# EAGLE board RC_Engine_Sound_ESP32 (EAGLE 9.6.1)
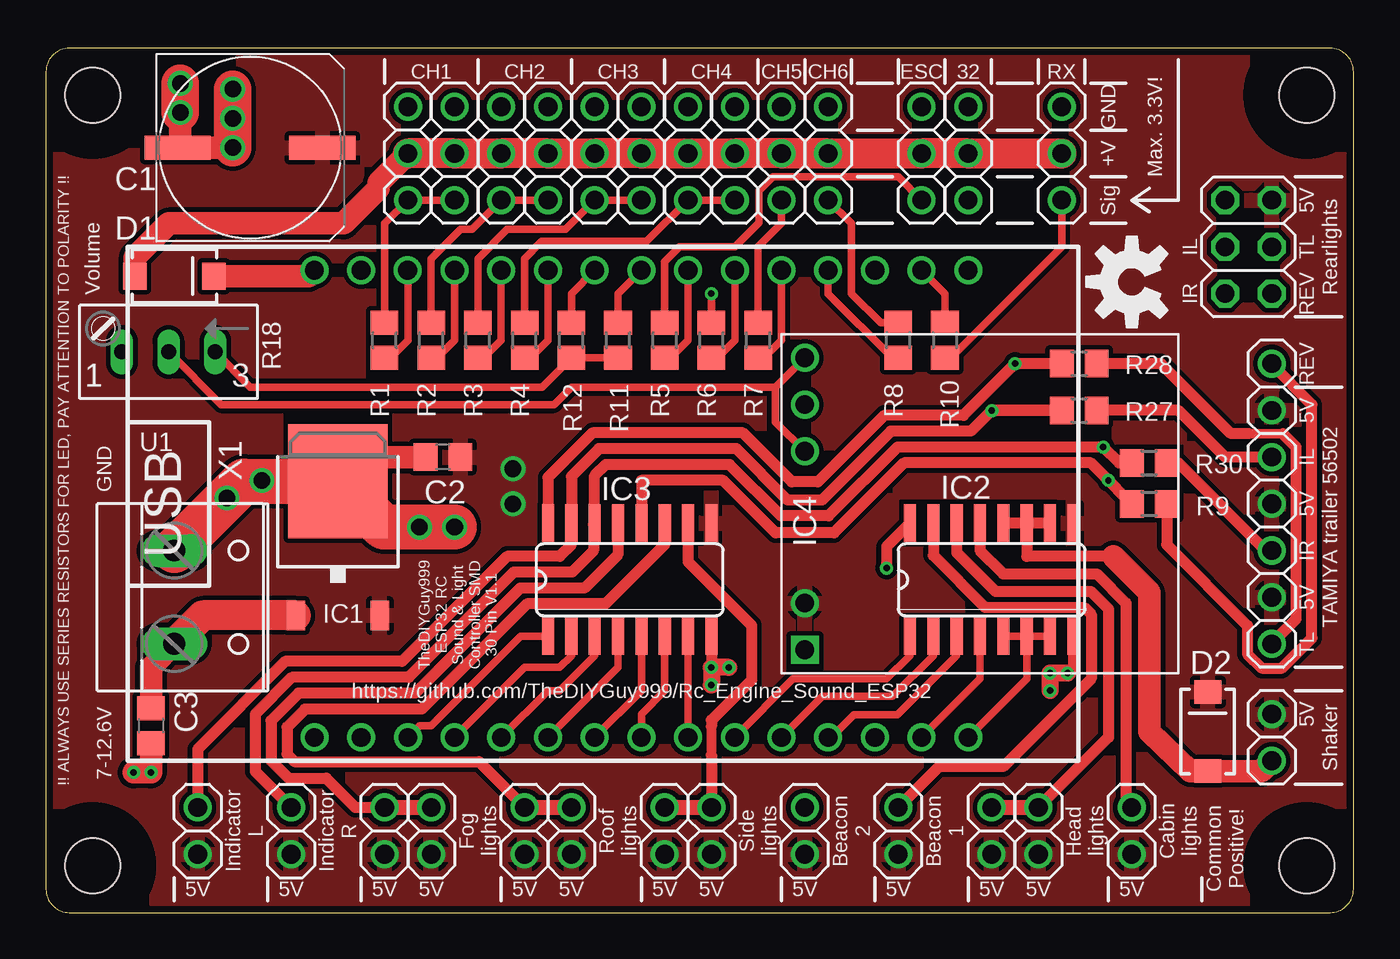
[diagram p0: board, top side]
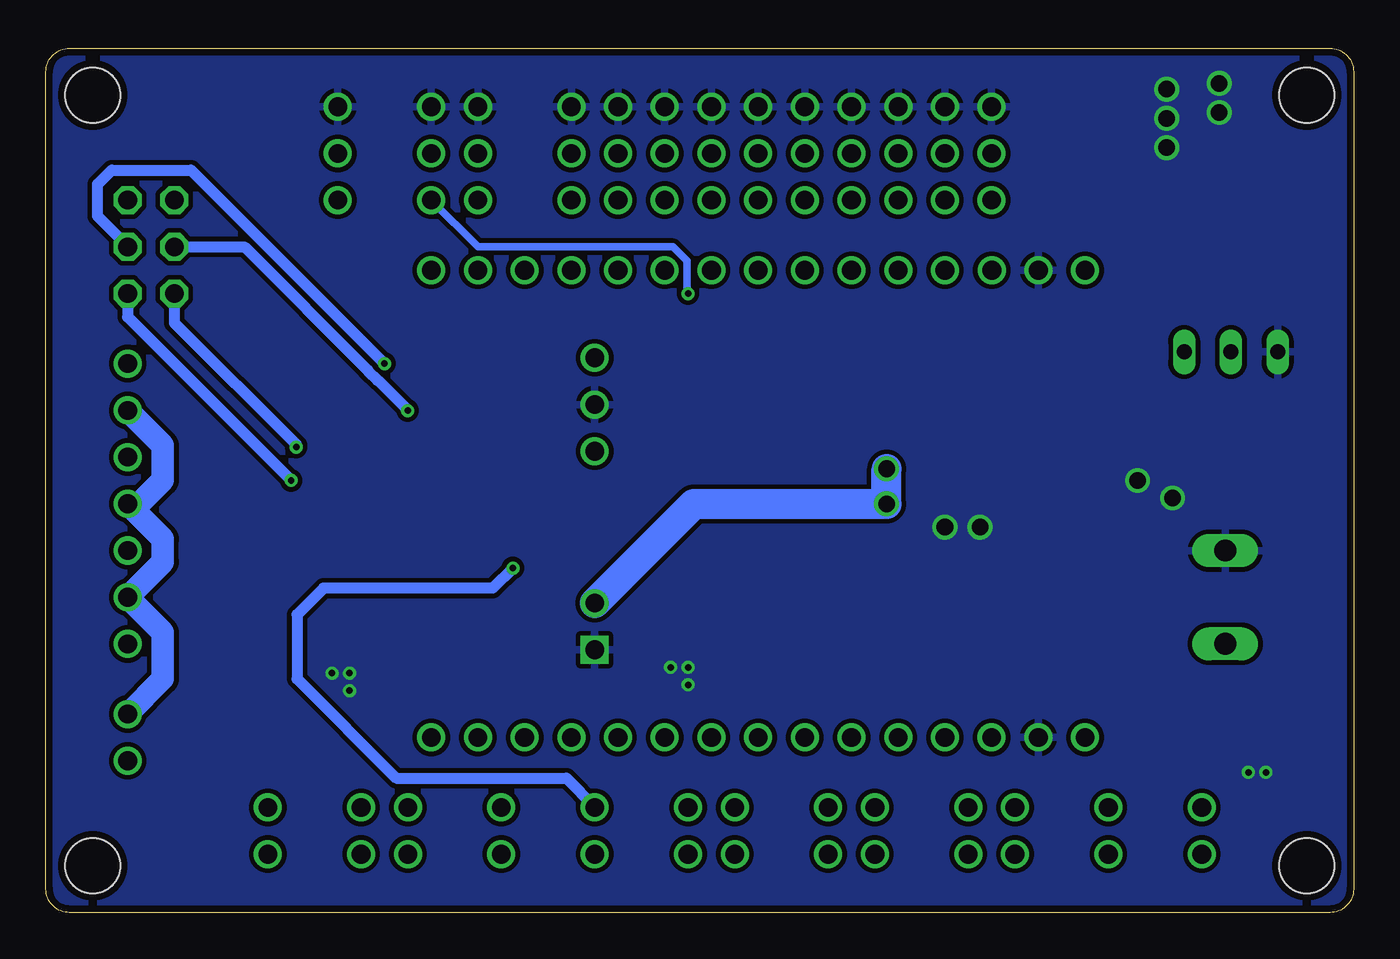
[diagram p1: board, bottom side, seen from below]

Size 71.12 x 46.99 mm. Coordinates in mm from the lower left corner, seen from the top.
Outline: 0,45.72 0,1.27 arc90 1.27,0 69.85,0 arc90 71.12,1.27 71.12,45.72 arc90 69.85,46.99 1.27,46.99 arc90 0,45.72
Copper layers (1*16): Top 0.0356mm / dielectric 1.5011mm / Bottom 0.0356mm
Design rules "OSHPark_LaenPCBOrder": minimum track width 6mil, minimum drill 13mil, track to track 6mil, track to pad 6mil, pad to pad 6mil, via to via 6mil, smd to smd 6mil, copper to edge 15mil, drill to drill 6mil, minimum pad ring 7mil, minimum via ring 7mil, stop-mask expansion 3mil, vias tented up to drill 0mil, thermal gap 10mil
Net classes: 0 5V: clearance 0.254 mm
Holes 3 mm at 2.54,44.45 2.54,2.54 68.58,2.54 68.58,44.45
tRestrict: area -0.7,41.2 to 5.8,47.7; area 65.3,41.2 to 71.8,47.7; area 65.3,-0.7 to 71.8,5.8; area -0.7,-0.7 to 5.8,5.8

## Footprints (pad centres in the part's own frame; a part is rotated, then mirrored left to right if it is on the bottom)
UD-10X10_NICHICON = smd 3.6 x 1.3: + 3.925,0; - -3.95,0
C0805 = smd 1.3 x 1.5: 1 -0.95,0; 2 0.95,0
SMA-DIODE = smd 1.27 x 1.47: A -2.15,0; C 2.15,0
TO252 = smd 1 x 1.6: 1 -2.28,-4.8; 2 2.28,-4.8 | smd 5.4 x 6.2: 3 0,2.5
SO16 = smd 0.66 x 2.032: 1 -4.445,-3.073; 2 -3.175,-3.073; 3 -1.905,-3.073; 4 -0.635,-3.073; 5 0.635,-3.073; 6 1.905,-3.073; 7 3.175,-3.073; 8 4.445,-3.073; 9 4.445,3.073; 10 3.175,3.073; 11 1.905,3.073; 12 0.635,3.073; 13 -0.635,3.073; 14 -1.905,3.073; 15 -3.175,3.073; 16 -4.445,3.073
PAM8403_NO_SPEAKERS = drill 1.016 square: 1 -7.62,8.89 | drill 1.016: 2 -5.08,8.89; 3 3.175,8.89; 4 5.715,8.89; 5 8.255,8.89
1X03 = drill 1.016 pad 1.524: 1 -2.54,0; 2 0,0; 3 2.54,0
1X02 = drill 1.016 pad 1.524: 1 -1.27,0; 2 1.27,0
2X03 = drill 1.016 octagon: 1 -2.54,-1.27; 2 -2.54,1.27; 3 0,-1.27; 4 0,1.27; 5 2.54,-1.27; 6 2.54,1.27
1X07 = drill 1.016: 1 -7.62,0; 2 -5.08,0; 3 -2.54,0; 4 0,0; 5 2.54,0; 6 5.08,0; 7 7.62,0
R0805 = smd 1.3 x 1.5: 1 -0.95,0; 2 0.95,0
S64W = drill 0.813 long: A 2.54,1.27; E -2.54,1.27; S 0,1.27
ESP32-DEVKITV1 = drill 1.016: 3V3 -16.51,-12.7; D1 13.97,-12.7; D2 -8.89,-12.7; D3 11.43,-12.7; D4 -6.35,-12.7; D5 1.27,-12.7; D12 -8.89,12.7; D13 -11.44,12.7; D14 -6.35,12.7; D15 -11.43,-12.7; D16 -3.81,-12.7; D17 -1.27,-12.7; D18 3.81,-12.7; D19 6.35,-12.7; D21 8.89,-12.7; D22 16.51,-12.7; D23 19.05,-12.7; D25 1.27,12.7; D26 -1.27,12.7; D27 -3.81,12.7; D32 6.35,12.7; D33 3.81,12.7; D34 11.43,12.7; D35 8.89,12.7; D36 16.51,12.7; D39 13.97,12.7; EN 19.05,12.7; GND@1 -13.97,12.7; GND@2 -13.97,-12.7; VIN -16.51,12.7
W237-132 = drill 1.194 long: 1 -2.54,-0.635; 2 2.54,-0.635

## Placement (x,y rotation side)
C1  1000uF 10V  [UD-10X10_NICHICON]  11.11,41.59 0 top
C2  100nF  [C0805]  21.59,24.77 180 top
C3  100nF  [C0805]  5.71,10.16 270 top
D1  SS14F  [SMA-DIODE]  6.99,34.61 0 top
D2  SS14F  [SMA-DIODE]  63.18,9.84 90 top
IC1  7805DT  [TO252]  15.88,20.96 0 top
IC2  ULN2003AD  [SO16]  51.44,18.1 0 top
IC3  ULN2003AD  [SO16]  31.75,18.1 0 top
IC4  PAM8403_NO_SPEAKERS  [PAM8403_NO_SPEAKERS]  50.16,21.91 90 top
JP1  [1X03]  19.68,41.27 270 top
JP2  [1X03]  22.22,41.27 270 top
JP3  [1X03]  24.76,41.27 270 top
JP4  [1X03]  27.3,41.27 270 top
JP5  [1X03]  29.84,41.27 270 top
JP6  [1X03]  32.39,41.27 270 top
JP7  [1X03]  34.93,41.27 270 top
JP8  [1X03]  37.47,41.27 270 top
JP9  [1X03]  47.62,41.27 270 top
JP10  [1X03]  50.16,41.27 270 top
JP11  [1X03]  40.01,41.27 270 top
JP12  [1X03]  42.55,41.27 270 top
JP14  [1X03]  55.25,41.27 270 top
JP16  [1X02]  8.26,4.45 90 top
JP17  [1X02]  13.34,4.45 90 top
JP18  [1X02]  18.41,4.45 90 top
JP19  [1X02]  20.95,4.45 90 top
JP20  [2X03]  65.41,36.2 90 top
JP21  [1X02]  26.04,4.45 90 top
JP22  [1X02]  28.57,4.45 90 top
JP23  [1X02]  33.66,4.45 90 top
JP24  [1X02]  36.2,4.45 90 top
JP25  [1X02]  41.27,4.45 90 top
JP26  [1X02]  46.36,4.45 90 top
JP27  [1X02]  51.44,4.45 90 top
JP28  [1X02]  53.98,4.45 90 top
JP29  [1X02]  66.67,9.53 270 top
JP30  [1X07]  66.67,22.23 270 top
JP31  [1X02]  59.05,4.45 90 top
LOGO1  OSHW-LOGOM  [OSHW-LOGO-M]  59.05,34.29 90 top
R1  330R  [R0805]  18.41,31.12 90 top
R2  330R  [R0805]  20.95,31.12 90 top
R3  330R  [R0805]  23.49,31.12 90 top
R4  330R  [R0805]  26.04,31.12 90 top
R5  330R  [R0805]  33.66,31.12 90 top
R6  330R  [R0805]  36.2,31.12 90 top
R7  330R  [R0805]  38.73,31.12 90 top
R8  330R  [R0805]  46.36,31.12 90 top
R9  200R  [R0805]  60.01,22.23 0 top
R10  330R  [R0805]  48.9,31.12 270 top
R11  10k  [R0805]  31.11,31.12 90 top
R12  10k  [R0805]  28.57,31.12 90 top
R18  20k  [S64W]  6.67,31.75 180 top
R27  200R  [R0805]  56.2,27.31 0 top
R28  47R  [R0805]  56.2,29.85 0 top
R30  200R  [R0805]  60.01,24.45 0 top
U1  ESP32DEVKITV1  [ESP32-DEVKITV1]  31.11,22.23 0 top
X1  [W237-132]  7.62,17.15 270 top

## Library data of the parts
C1 = rcl; SPICEPREFIX: C
C2 C3 = rcl
D1 D2 = SparkFun-DiscreteSemi; PROD_ID: DIO-08053
IC1 = linear
IC2 IC3 = uln-udn
IC4 = 00_custom
JP1-JP12 JP14 JP16-JP31 = 00_custom_pinhead
LOGO1 = SparkFun-Aesthetics
R1-R12 R27 R28 R30 = rcl; SPICEPREFIX: R
R18 = pot
U1 = ESP32-DEVKITV1_30pin
X1 = con-wago-508; OC_FARNELL: unknown; OC_NEWARK: unknown

## Nets
3V3: U1.3V3
5V: C1.+ C2.1 D2.C IC1.2 IC2.9 IC3.9 IC4.2 JP16.1 JP17.1 JP18.1 JP19.1 JP20.5 JP21.1 JP22.1 JP23.1 JP24.1 JP25.1 JP26.1 JP27.1 JP28.1 JP29.1 JP30.2 JP30.4 JP30.6 JP31.1
5V_ESC: D1.A JP1.2 JP2.2 JP3.2 JP4.2 JP5.2 JP6.2 JP7.2 JP8.2 JP9.2 JP10.2 JP11.2 JP12.2 JP14.2
BAT+: C3.1 IC1.1 X1.2
BEACONLIGHT1: IC2.15 JP26.2
BEACONLIGHT2: IC2.16 JP25.2
CABINLIGHTS: IC2.13 JP31.2
D1: U1.D1
D2: IC3.2 U1.D2
D3: IC2.3 U1.D3
D4: IC3.3 U1.D4
D5: IC3.6 U1.D5
D12: R2.1 U1.D12
D13: R1.1 U1.D13
D14: R3.1 U1.D14
D15: IC3.1 U1.D15
D16: IC3.4 U1.D16
D17: IC3.5 U1.D17
D18: IC3.7 U1.D18
D19: IC2.1 U1.D19
D21: IC2.2 U1.D21
D22: IC2.4 U1.D22
D23: IC2.5 IC2.6 IC2.7 U1.D23
D25: R11.2 U1.D25
D26: R12.2 U1.D26
D27: R4.1 U1.D27
D32: R6.1 U1.D32
D33: R5.1 U1.D33
D34: R8.1 U1.D34
D35: R7.1 U1.D35
D36: R10.1 U1.D36
D39: U1.D39
FOGLIGHTS: IC3.13 JP18.2 JP19.2
GND: C1.- C2.2 C3.2 IC1.3 IC2.8 IC3.8 IC4.1 IC4.4 JP1.1 JP2.1 JP3.1 JP4.1 JP5.1 JP6.1 JP7.1 JP8.1 JP9.1 JP10.1 JP11.1 JP12.1 JP14.1 R18.A U1.GND@1 U1.GND@2 X1.1
HEADLIGHTS: IC2.14 JP27.2 JP28.2
INDICATOR_L: IC3.15 JP16.2 JP20.4 R27.1
INDICATOR_R: IC3.14 JP17.2 JP20.2 R30.1
N$1: IC4.3 IC4.5 R18.S
N$2: R11.1 R12.1 R18.E
N$3: JP1.3 JP2.3 R1.2
N$4: JP30.7 R28.2
N$5: JP3.3 JP4.3 R2.2
N$6: JP5.3 JP6.3 R3.2
N$7: JP7.3 JP8.3 R4.2
N$8: JP9.3 R5.2
N$9: D1.C U1.VIN
N$10: JP10.3 R6.2
N$11: JP11.3 R7.2
N$12: JP12.3 R8.2
N$13: JP30.5 R30.2
N$14: JP14.3 R10.2
N$15: JP30.3 R27.2
N$16: JP30.1 R9.2
REVERSING: IC3.12 JP20.1 R9.1
ROOFLIGHTS: IC3.11 JP21.2 JP22.2
SHAKER: D2.A IC2.10 IC2.11 IC2.12 JP29.2
SIDELIGHTS: IC3.10 JP23.2 JP24.2
TAILLIGHTS: IC3.16 JP20.3 R28.1

## Tracks (layer width: path | path; a pad name or v marks a point on that pad's centre or on a via)
5V  (via drill 0.9)
  Bottom 1.219: JP30.2 64.77,25.4 64.77,23.5 66.04,22.23 JP30.4 64.77,20.32 64.77,19.05 JP30.6 64.77,15.24 64.77,12.7 JP29.1
  Bottom 1.626: IC4.2 35.88,22.23 v25.4,22.23 v25.4,24.13
  pour Top: -3.13,-1.91 -3.13,19.52 -2.8,48.89 73.02,48.89 73.02,-1.91
5V_ESC
  Top 1.219: JP1.2 18.1,39.69 18.1,39.37 16.19,37.46 6.67,37.46 4.83,35.63 D1.A
  Top 1.626: JP12.2 JP11.2 | JP11.2 JP9.2 JP10.2 JP14.2 | JP11.2 JP8.2 JP7.2 JP6.2 JP5.2 JP4.2 JP3.2 JP2.2 JP1.2
BAT+
  Top 1.219: C3.1 5.71,13.33 X1.2
  Top 1.626: X1.2 6.99,14.62 8.52,16.16 IC1.1
BEACONLIGHT1
  Top 0.61: IC2.15 48.26,19.42 51.08,16.6 56.48,16.6 56.86,16.22 56.86,12.72 52.07,7.94 48.58,7.94 JP26.2
BEACONLIGHT2  (via drill 0.35)
  Top 0.61: IC2.16 45.72,19.9 v45.72,18.73
  Bottom 0.61: v45.72,18.73 46.82,17.64 56.02,17.64 57.47,16.19 57.47,12.7 52.07,7.3 42.81,7.3 41.27,5.77 JP25.2
CABINLIGHTS
  Top 0.61: IC2.13 50.8,19.69 52.07,18.42 57.15,18.42 58.74,16.83 58.74,6.03 JP31.2
D2
  Top 0.406: U1.D2 26.04,13.33 27.94,13.33 28.57,13.97 IC3.2
D3
  Top 0.406: IC2.3 49.53,13.97 46.3,10.74 43.95,10.74 42.73,9.53 U1.D3
D4
  Top 0.406: U1.D4 27.3,12.06 27.94,12.06 29.84,13.97 IC3.3
D5
  Top 0.406: U1.D5 32.39,10.79 33.66,12.06 33.66,15.88
  Top 0.61: IC3.6 33.66,15.88
D12
  Top 0.406: U1.D12 22.22,31.12 21.27,30.17 R2.1
D13
  Top 0.406: U1.D13 19.68,31.12 18.73,30.17 R1.1
D14
  Top 0.406: U1.D14 24.76,31.12 23.81,30.17 R3.1
D15
  Top 0.406: U1.D15 20.32,10.16 20.95,10.16 25.82,15.02 IC3.1
D16
  Top 0.406: U1.D16 31.11,13.33 IC3.4
D17
  Top 0.406: U1.D17 32.39,12.06 IC3.5
D18
  Top 0.406: U1.D18 IC3.7
D19
  Top 0.406: U1.D19 40.64,12.7 45.72,12.7 46.99,13.97 IC2.1
D21
  Top 0.406: IC2.2 48.26,13.97 46.04,11.75 42.23,11.75 U1.D21
D22
  Top 0.406: IC2.4 50.8,12.7 U1.D22
D23
  Top 0.406: IC2.7 IC2.6 | IC2.6 IC2.5 | IC2.6 53.34,12.7 U1.D23
D25
  Top 0.406: R11.2 31.11,33.66 U1.D25
D26
  Top 0.406: R12.2 28.57,33.66 U1.D26
D27
  Top 0.406: U1.D27 27.3,31.12 26.35,30.17 R4.1
D32
  Top 0.406: U1.D32 37.47,31.12 36.52,30.17 R6.1
D33
  Top 0.406: U1.D33 34.93,31.12 33.98,30.17 R5.1
D34
  Top 0.406: U1.D34 42.55,33.66 46.04,30.17 R8.1
D35
  Top 0.406: U1.D35 40.01,31.12 39.05,30.17 R7.1
D36
  Top 0.406: U1.D36 48.9,33.66 R10.1
FOGLIGHTS
  Top 0.61: JP18.2 16.83,5.71 15.24,7.3 13.2,7.3 12.24,8.26 12.24,10.44 13.73,11.92 20.08,11.92 25.8,17.64 29.29,17.64 31.11,19.46 IC3.13
  Top 0.813: JP18.2 JP19.2
GND  (via drill 0.35, 0.9)
  Top 0.61: IC3.8 v36.2,13.33 | IC2.8 55.88,13.33 v55.56,13.02 | IC1.3 17.18,24.77
  Top 0.914: v55.56,13.02 v54.61,13.02 v54.61,12.06 | v37.15,13.33 v36.2,13.33 v36.2,12.38
  Top 1.219: 17.18,24.77 C2.2 | C3.2 v5.71,7.62 v4.76,7.62 | v7.3,43.5 7.3,41.73 C1.- v10.16,41.59
  Top 2.032: v7.3,43.5 v7.3,45.09 | v10.16,41.59 v10.16,43.18 v10.16,44.77
  Top 2.438: X1.1 10.76,23.46 IC1.3 18.38,20.96 v20.32,20.96 v22.22,20.96
  other vias: 11.75,23.5 9.84,22.54
  pour Bottom: -0.64,47.62 71.75,47.62 71.75,-0.64 -0.64,-0.64
HEADLIGHTS
  Top 0.61: IC2.14 49.53,19.58 51.65,17.46 56.83,17.46 57.79,16.51 57.79,9.53 JP28.2
  Top 0.813: JP27.2 JP28.2
INDICATOR_L  (via drill 0.35)
  Top 0.61: JP16.2 8.26,8.89 13.02,13.65 19.37,13.65 21.91,16.19 25.08,19.37 27.94,19.37 28.57,20 IC3.15 28.57,23.71 30.08,25.22 37.55,25.22 40.34,22.43 42.21,22.43 45.96,26.18 50.31,26.18 v51.44,27.31 R27.1 51.46,27.31 v51.45,27.29
  Bottom 0.61: JP20.4 60.33,36.2 53.62,29.49 53.62,29.47 53.09,28.93 53.06,28.93 v51.44,27.31 v51.45,27.29
INDICATOR_R  (via drill 0.35)
  Top 0.61: R30.1 58.37,24.45 v57.51,25.31 46.32,25.31 42.57,21.57 39.98,21.57 37.19,24.36 30.44,24.36 29.84,23.76 IC3.14 29.78,21.11 29.78,19.67 28.61,18.5 25.44,18.5 23.15,16.22 22.52,15.58 19.72,12.79 13.38,12.79 11.38,10.79 11.38,7.67 JP17.2
  Bottom 0.61: JP20.2 64.13,32.07 57.47,25.4 57.47,25.35 v57.51,25.31
N$1
  Top 0.406: IC4.3 39.69,26.67 39.69,28.58 | R18.S 9.53,27.62 27.62,27.62 28.57,28.58 39.69,28.58 | IC4.5 39.69,28.58
N$2
  Top 0.406: R11.1 R12.1 26.98,28.58 11.11,28.58 R18.E
N$3
  Top 0.406: R1.2 18.41,37.46 JP1.3 JP2.3
N$4
  Top 0.508: 67.27,26.04 65.41,26.04
  Top 0.61: JP30.7 66.67,14.64 68,15.96 68,25.31 67.27,26.04 | 65.41,26.04 64.45,26.04 60.64,29.85 R28.2
N$5
  Top 0.406: R2.2 20.95,35.56 22.54,37.15 23.18,37.15 JP3.3 JP4.3
N$6
  Top 0.406: JP6.3 JP5.3 28.26,37.15 25.08,37.15 23.49,35.56 R3.2
N$7
  Top 0.406: JP8.3 JP7.3 32.68,36.49 26.96,36.49 26.04,35.56 R4.2
N$8
  Top 0.406: JP9.3 46.36,40 39.55,40 38.79,39.24 38.79,37.52 37.47,36.2 34.47,36.2 33.66,35.38 R5.2
N$9
  Top 1.219: D1.C 14.29,34.61 U1.VIN
N$10  (via drill 0.35)
  Top 0.406: R6.2 v36.2,33.66
  Bottom 0.406: v36.2,33.66 36.25,33.71 36.25,35.43 37.01,36.2 47.62,36.2 JP10.3
N$11
  Top 0.406: R7.2 38.73,36.2 40.01,37.46 JP11.3
N$12
  Top 0.406: JP12.3 43.82,37.46 43.82,33.66 45.41,32.06 R8.2
N$13
  Top 0.61: JP30.5 66.36,19.69 61.59,24.45 R30.2
N$14
  Top 0.406: R10.2 49.22,30.17 55.25,36.2 JP14.3
N$15
  Top 0.61: JP30.3 64.13,24.77 61.59,27.31 R27.2
N$16
  Top 0.61: JP30.1 66.67,29.81 68.86,27.62 68.86,14.92 67.22,13.28 66.13,13.28 65.35,14.06 65.35,15.61 60.96,20 R9.2
REVERSING  (via drill 0.35)
  Top 0.61: R9.1 58.74,22.54 v57.79,23.5 56.83,24.45 46.67,24.45 42.86,20.64 39.69,20.64 36.83,23.5 32.39,23.5 IC3.12
  Bottom 0.61: JP20.1 66.67,32.38 v57.79,23.5
ROOFLIGHTS
  Top 0.61: IC3.11 33.66,20 30.43,16.78 26.16,16.78 20.44,11.06 14.09,11.06 13.11,10.08 13.11,8.61 13.52,8.2 23.55,8.2 JP21.2
  Top 0.813: JP21.2 JP22.2
SHAKER
  Top 0.61: IC2.10 IC2.11 | IC2.11 IC2.12 | IC2.11 53.34,19.37 58.05,19.37 | D2.A 63.11,7.69
  Top 1.219: 58.05,19.37 60.01,17.41 60.01,9.83 62.23,7.69 63.11,7.69 | JP29.2 66.11,7.69 D2.A
SIDELIGHTS
  Top 0.508: 36.2,10.12 36.2,8.57
  Top 0.61: 36.2,10.12 36.2,10.46 38.38,12.64 38.38,15.61 34.93,19.07 IC3.10 | 36.2,8.57 JP24.2
  Top 0.813: JP23.2 JP24.2
TAILLIGHTS  (via drill 0.35)
  Top 0.61: R28.1 v52.71,29.85 49.9,27.04 45.6,27.04 41.98,23.42 40.57,23.42 37.9,26.09 29.72,26.09 27.3,23.67 IC3.16
  Bottom 0.61: JP20.3 66.67,36.23 68.31,37.87 68.31,39.6 67.54,40.37 63.23,40.37 v52.71,29.85

## Text on the board
tNames: CH1 | CH2 | CH3 | CH4 | CH5 | CH6 | ESC | 32 | RX | GND | +V | Max. 3.3V! | Sig | 5V | IL | TL | Rearlights | Volume | IR | REV | REV | 5V | IL | !! ALWAYS USE SERIES RESISTORS FOR LED, PAY ATTENTION TO POLARITY !! | GND | 5V | TAMIYA trailer 56502 | IR | 5V | TheDIYGuy999 / ESP32 RC / Sound & Light / Controller SMD / 30 Pin V1.1 | TL | https://github.com/TheDIYGuy999/Rc_Engine_Sound_ESP32 | 5V | 7-12.6V | Shaker | Indicator / L | Indicator / R | Fog / lights | Roof / lights | Side / lights | Beacon / 2 | Beacon / 1 | Head / lights | Cabin / lights | Common / Positive! | 5V | 5V | 5V | 5V | 5V | 5V | 5V | 5V | 5V | 5V | 5V | 5V | 5V